# Altium PCB VCA.PcbDoc
Units mm, origin at the board's own origin, x right, y up, seen from the top; angles counter-clockwise.
Board outline 119.35 x 110.6 mm, 2 copper layers (Top Layer, Bottom Layer); 107 components, 65 nets, 292 pads, 0 vias.
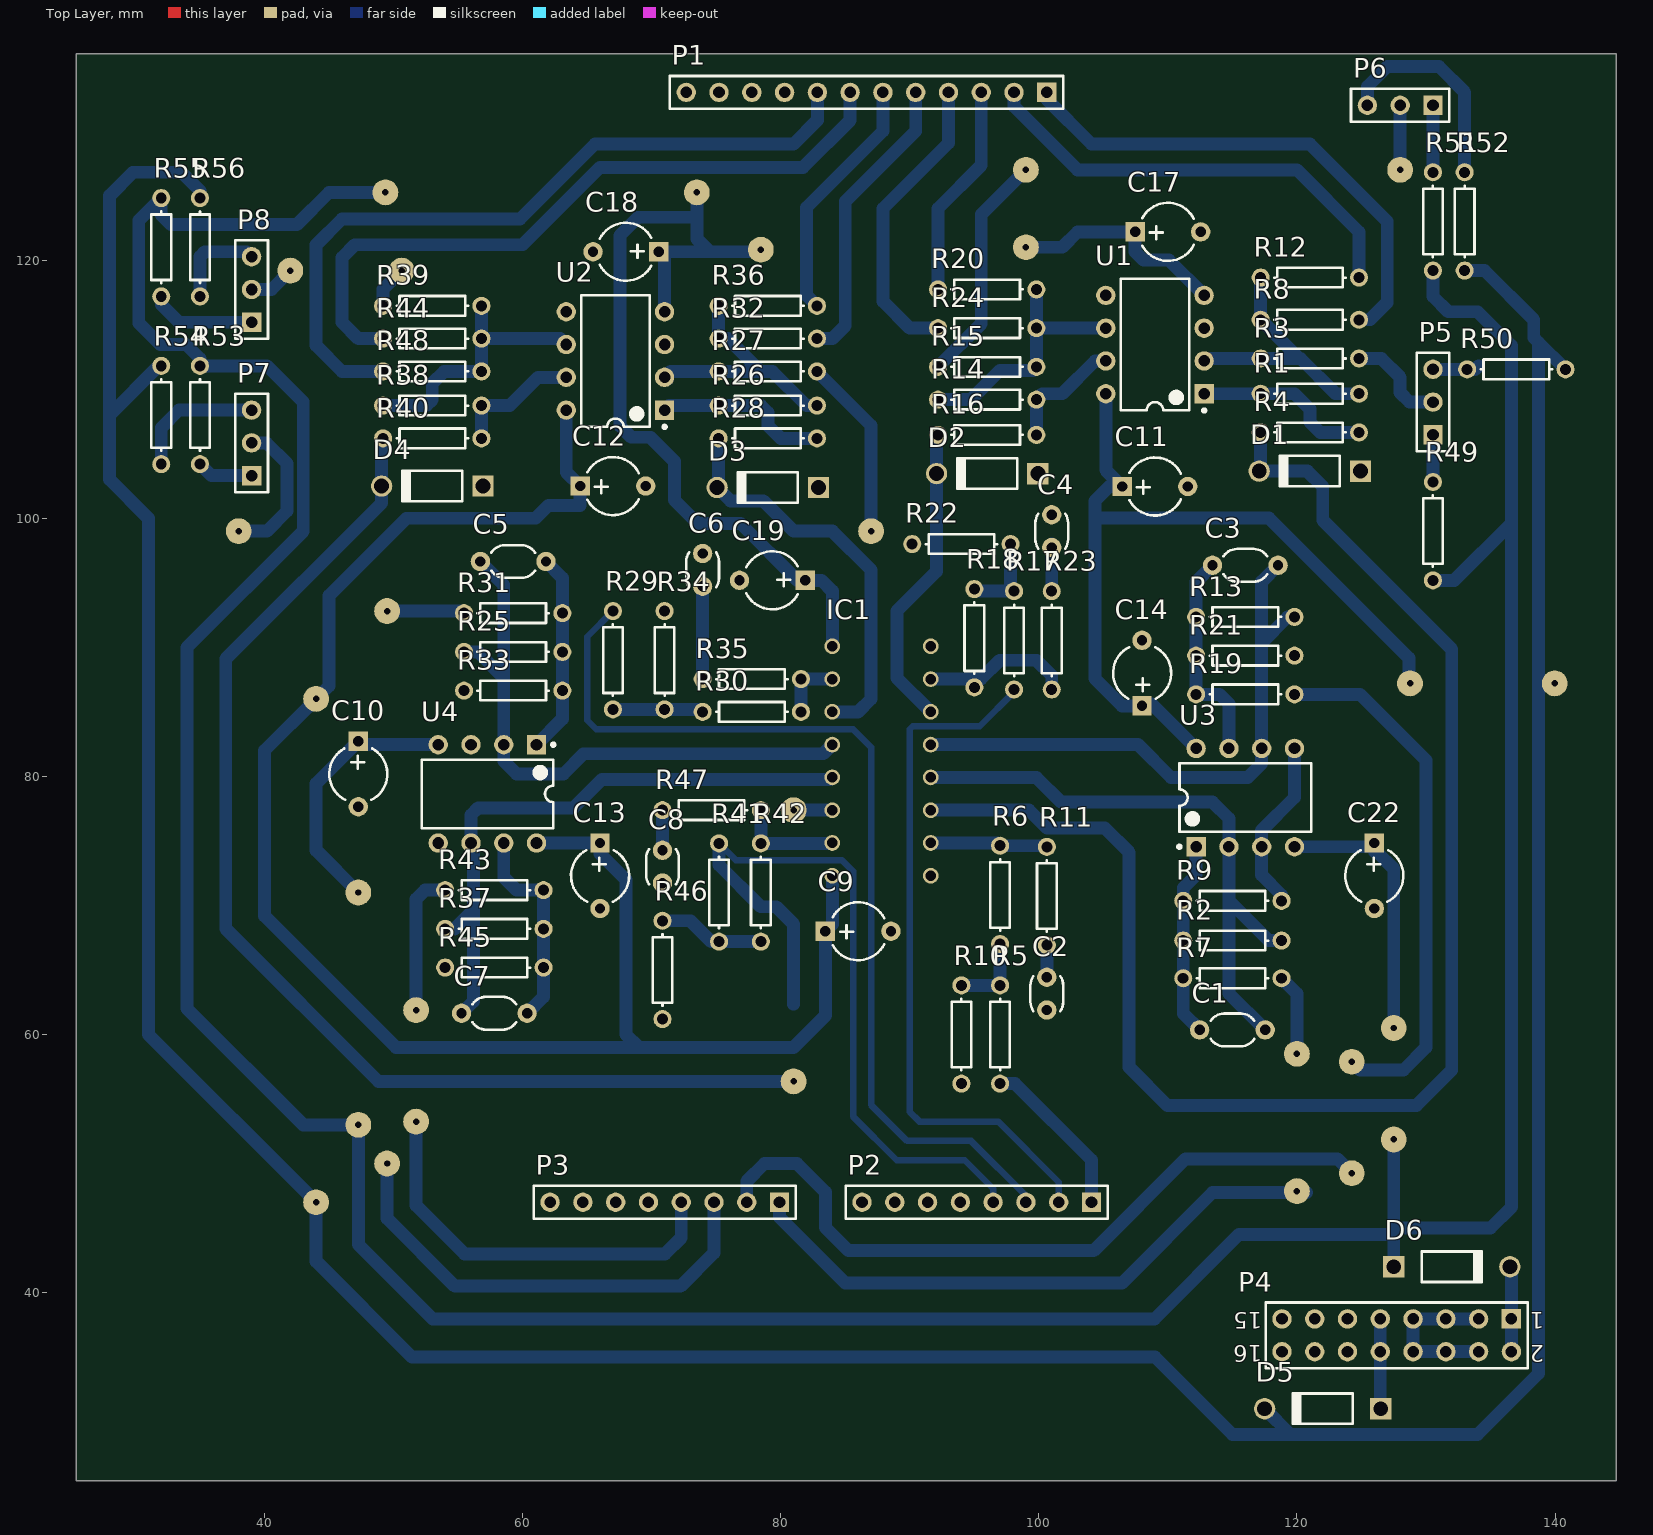
[diagram p0: Top Layer view]
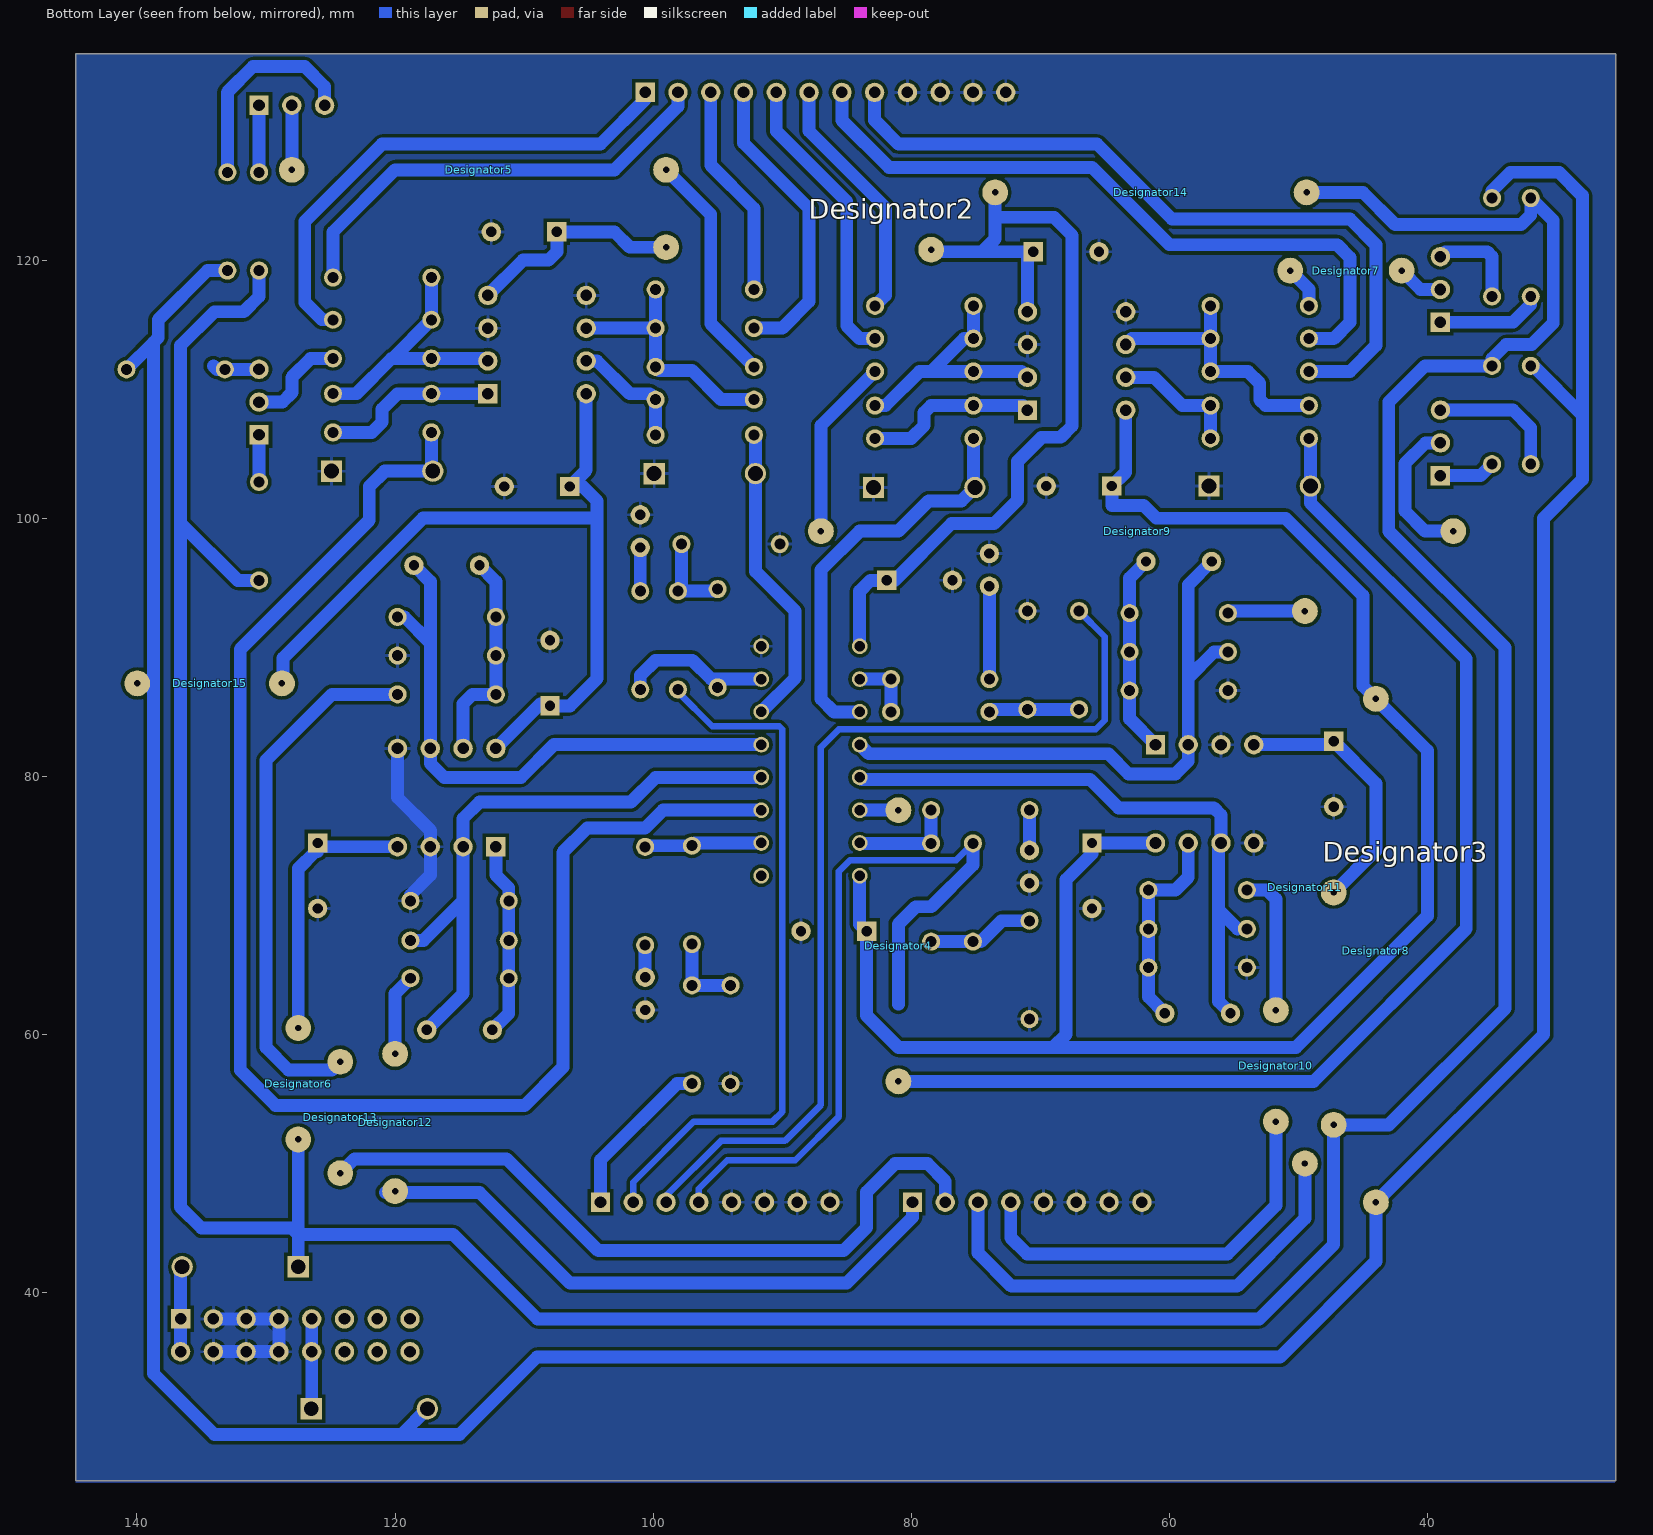
[diagram p1: Bottom Layer view, seen from below]

## Layer stack, top to bottom
Top Solder: solder mask 0.0102, Solder Resist, Dk 3.5
Top Layer: signal copper 0.0356
Dielectric 1: dielectric 0.32, FR-4, Dk 4.8
Bottom Layer: signal copper 0.0356
Bottom Solder: solder mask 0.0102, Solder Resist, Dk 3.5

## Board outline
25.4,25.4 144.75,25.4 144.75,136 25.4,136

## Design rules (kind name [scope] priority, off if disabled: settings)
Clearance [All] p1: gap=0.254 ignorepadtopadclearanceinfootprint=FALSE except(0: Arc-Hole Track-Hole SMDPad-Hole THPad-Hole Via-Hole Fill-Hole Poly-Hole Region-Hole Text-Hole)
ComponentClearance [All] p1: gap=0 collisioncheckmode=3 verticalgap=0.254 showdistances=FALSE
PolygonConnect [All] p1: connectstyle=Relief reliefconductorwidth=0.254 reliefentries=4 polygonreliefangle="90 Angle" airgapwidth=0.254
RoutingVias [All] p1: holewidth=0.711 width=1.27 viastyle="Through Hole" minholewidth=0.711 minwidth=1.27 maxholewidth=0.711 maxwidth=1.27
SolderMaskExpansion [All] p1: expansion=0.102
Width [All] p1: maxlimit=2 minlimit=0.254 preferedwidth=1
29 further rules are at their usual default settings.

## Classes and differential pairs
component class VCA: C1 C2 C3 C4 C5 C6 C7 C8 C9 C10 C11 C12 C13 C14 C17 C18 C19 C22 D1 D2 D3 D4 D5 D6 IC1 P1 P2 P3 P4 P5 P6 P7 P8 R1 R2 R3 R4 R5 R6 R7 R8 R9 R10 R11 R12 R13 R14 R15 R16 R17 R18 R19 R20 R21 R22 R23 R24 R25 R26 R27 R28 R29 R30 R31 R32 R33 R34 R35 R36 R37 R38 R39 R40 R41 R42 R43 R44 R45 R46 R47 R48 R49 R50 R51 R52 R53 R54 R55 R56 U1 U2 U3 U4

## Components (designator, comment, footprint, x,y, rotation, side; value= is the part's Value field where it differs from the comment)
C1 "100pF" CAPRR508-254X381X584 115,60.355 r180 top
C2 "560pF" CAPRR254-254X381X381 100.62,63.165 r90 top
C3 "100pF" CAPRR508-254X381X584 116,96.355 r180 top
C4 "560pF" CAPRR254-254X381X381 101,99 r270 top
C5 "100pF" CAPRR508-254X381X584 59.27,96.644 r0 top
C6 "560pF" CAPRR254-254X381X381 73.95,96 r270 top
C7 "100pF" CAPRR508-254X381X584 57.81,61.644 r0 top
C8 "560pF" CAPRR254-254X381X381 70.84,73 r90 top
C9 "0.1uF" CAPPRB508-450x850 86,68 r0 top
C10 "0.1uF" CAPPRB508-450x850 47.27,80.184 r270 top
C11 "0.1uF" CAPPRB508-450x850 109,102.46 r0 top
C12 "0.1uF" CAPPRB508-450x850 67,102.495 r0 top
C13 "0.1uF" CAPPRB508-450x850 66,72.3 r270 top
C14 "0.1uF" CAPPRB508-450x850 108,88 r90 top
C17 "0.1uF" CAPPRB508-450x850 110,122.19 r0 top
C18 "0.1uF" CAPPRB508-450x850 68,120.65 r180 top
C19 "0.1uF" CAPPRB508-450x850 79.35,95.19 r180 top
C22 "0.1uF" CAPPRB508-450x850 126,72.3 r270 top
D1 "1N5817-T" DIOD-DO-41-P-2 121,103.65 r180 top
D2 "1N5817-T" DIOD-DO-41-P-2 96,103.46 r180 top
D3 "1N5817-T" DIOD-DO-41-P-2 79,102.38 r180 top
D4 "1N5817-T" DIOD-DO-41-P-2 53,102.495 r180 top
D5 "1N4001-T" DIOD-DO-41-P-2_V 122,31 r180 top
D6 "1N4001-T" DIOD-DO-41-P-2_V 132,42 r0 top
Designator2 "Comment" Jumper#1 87.096,120.81 r180 bottom
Designator3 "Comment" Jumper#2 51.389,71.014 r90 bottom
Designator4 "Comment" Jumper#3 81,56.364 r90 bottom
Designator5 "Comment" Jumper#4 99,127 r0 bottom
Designator6 "Comment" Jumper#5 127.504,60.5 r270 bottom
Designator7 "Comment" Jumper#5 50.636,119.19 r180 bottom
Designator8 "Comment" Jumper#6 44,86 r270 bottom
Designator9 "Comment" Jumper#7 46.636,99 r180 bottom
Designator10 "Comment" Jumper#5 51.75,53.25 r90 bottom
Designator11 "Comment" Jumper#8 49.5,50 r90 bottom
Designator12 "Comment" Jumper#9 120,47.864 r90 bottom
Designator13 "Comment" Jumper#5 124.25,49.25 r90 bottom
Designator14 "Comment" Jumper#10 49.364,125.25 r0 bottom
Designator15 "Comment" Jumper#11 128.764,87.2 r0 bottom
IC1 "SSM2164P" DIL16 87.81,81.19 r90 top
P1 "Header 12" HDR1X12 100.62,133 r180 top
P2 "Header 8" HDR1X8 104.08,47 r180 top
P3 "Header 8" HDR1X8 79.91,47 r180 top
P4 "Header 8X2" HDR2X8 136.62,37.96 r180 top
P5 "Header 3" HDR1X3 130.54,106.46 r90 top
P6 "Header 3" HDR1X3 130.54,132 r180 top
P7 "Header 3" HDR1X3 39,103.3 r90 top
P8 "Header 3" HDR1X3 39,115.19 r90 top
R1 "Res1" AXIAL-0.3 121,109.65 r180 top value=1K
R2 "Res1" AXIAL-0.3 115,67.275 r0 top value=1K
R3 "Res1" AXIAL-0.3 121,112.38 r180 top value=1K
R4 "Res1" AXIAL-0.3 121,106.65 r180 top value=1K
R5 "Res1" AXIAL-0.3 97,60 r90 top value=1K
R6 "Res1" AXIAL-0.3 97,70.815 r90 top value=1K
R7 "Res1" AXIAL-0.3 115,64.355 r180 top value=1K
R8 "Res1" AXIAL-0.3 121,115.38 r180 top value=1K
R9 "Res1" AXIAL-0.3 115,70.355 r180 top value=1K
R10 "Res1" AXIAL-0.3 94,60 r90 top value=1K
R11 "Res1" AXIAL-0.3 100.62,70.73 r90 top value=1K
R12 "Res1" AXIAL-0.3 121,118.65 r180 top value=1K
R13 "Res1" AXIAL-0.3 116,92.355 r0 top value=1K
R14 "Res1" AXIAL-0.3 96,109.19 r0 top value=1K
R15 "Res1" AXIAL-0.3 96,111.73 r0 top value=1K
R16 "Res1" AXIAL-0.3 96,106.46 r180 top value=1K
R17 "Res1" AXIAL-0.3 98.08,90.54 r90 top value=1K
R18 "Res1" AXIAL-0.3 95,90.705 r270 top value=1K
R19 "Res1" AXIAL-0.3 116,86.355 r180 top value=1K
R20 "Res1" AXIAL-0.3 96,117.73 r0 top value=1K
R21 "Res1" AXIAL-0.3 116,89.355 r180 top value=1K
R22 "Res1" AXIAL-0.3 94,98 r0 top value=1K
R23 "Res1" AXIAL-0.3 101,90.54 r270 top value=1K
R24 "Res1" AXIAL-0.3 96,114.73 r0 top value=1K
R25 "Res1" AXIAL-0.3 59.27,89.644 r180 top value=1K
R26 "Res1" AXIAL-0.3 79,108.73 r180 top value=1K
R27 "Res1" AXIAL-0.3 79,111.38 r180 top value=1K
R28 "Res1" AXIAL-0.3 79,106.19 r180 top value=1K
R29 "Res1" AXIAL-0.3 67,89 r270 top value=1K
R30 "Res1" AXIAL-0.3 77.76,85 r0 top value=1K
R31 "Res1" AXIAL-0.3 59.27,92.644 r0 top value=1K
R32 "Res1" AXIAL-0.3 79,113.92 r180 top value=1K
R33 "Res1" AXIAL-0.3 59.27,86.644 r0 top value=1K
R34 "Res1" AXIAL-0.3 71,89 r270 top value=1K
R35 "Res1" AXIAL-0.3 77.76,87.54 r0 top value=1K
R36 "Res1" AXIAL-0.3 79,116.46 r180 top value=1K
R37 "Res1" AXIAL-0.3 57.81,68.184 r180 top value=1K
R38 "Res1" AXIAL-0.3 53,108.73 r0 top value=1K
R39 "Res1" AXIAL-0.3 53,116.46 r0 top value=1K
R40 "Res1" AXIAL-0.3 53,106.19 r180 top value=1K
R41 "Res1" AXIAL-0.3 75.22,71 r270 top value=1K
R42 "Res1" AXIAL-0.3 78.46,71 r90 top value=1K
R43 "Res1" AXIAL-0.3 57.81,71.184 r0 top value=1K
R44 "Res1" AXIAL-0.3 53,113.92 r0 top value=1K
R45 "Res1" AXIAL-0.3 57.81,65.184 r0 top value=1K
R46 "Res1" AXIAL-0.3 70.84,65 r90 top value=1K
R47 "Res1" AXIAL-0.3 74.65,77.38 r0 top value=1K
R48 "Res1" AXIAL-0.3 53,111.38 r0 top value=1K
R49 "Res1" AXIAL-0.3 130.54,99 r90 top value=1K
R50 "Res1" AXIAL-0.3 137,111.54 r0 top value=1K
R51 "Res1" AXIAL-0.3 130.54,123 r90 top value=1K
R52 "Res1" AXIAL-0.3 133,123 r270 top value=1K
R53 "Res1" AXIAL-0.3 35,108 r270 top value=1K
R54 "Res1" AXIAL-0.3 32,108 r90 top value=1K
R55 "Res1" AXIAL-0.3 32,121 r270 top value=1K
R56 "Res1" AXIAL-0.3 35,121 r90 top value=1K
U1 "TL082CN" STM-N8 109,113.46 r180 top
U2 "TL082CN" STM-N8 67.19,112.19 r180 top
U3 "TL082CN" STM-N8 116,78.355 r90 top
U4 "TL082CN" STM-N8 57.27,78.644 r270 top

## Footprints (in the part's own frame and the unit in brackets; to place one, negate y for a bottom-side part, rotate by r counter-clockwise, add the part's x,y. Pads: shape width x height; smd on the part's side, far side on the other; paste and mask are expansions set on the pad)
AXIAL-0.3 [mm] "Axial Device, Thru-Hole; 2 Leads; 0.3 in Pin Spacing"
  round 1.4 hole 0.85: 1(-3.81,0) 2(3.81,0)
  silkscreen extent -2.77,-0.76 2.77,0.76
CAPPRB508-450x850 [mm] "Capacitor, Polarized Radial Bead, Pin spacing 5.08mm - Body Diameter 4.5mm X Body Height 8.5mm"
  rect 1.5x1.5 hole 0.8: 1(-2.54,0)
  round 1.5 hole 0.8: 2(2.54,0)
  silkscreen extent -1.98,-2.25 2.01,2.25, body extent -2.79,-2.25 2.79,2.25, height 8.97
CAPRR254-254X381X381 [mm] "Capacitor Radial Rounded, Pin spacing 2.54mm - Body With 2.54mm X Body Length 3.81mm X Body Height 3.81mm"
  round 1.5 hole 0.8: 1(-1.27,0) 2(1.27,0)
  silkscreen extent -1.35,-1.27 1.35,1.27, body extent -1.9,-1.27 1.91,1.27, height 3.81
CAPRR508-254X381X584 [mm] "Capacitor Radial Rounded (KEMET C317), Pin spacing 5.08mm - Body With 2.54mm X Body Length 3.81mm X Body Height 5.84mm"
  round 1.5 hole 0.8: 1(-2.54,0) 2(2.54,0)
  silkscreen extent -1.69,-1.27 1.69,1.27, body extent -2.79,-1.27 2.79,1.27, height 5.84
DIL16 [mil]
  round 48 / inner round 60 / far side round 48 hole 32: 1(-350,-150) 2(-250,-150) 3(-150,-150) 4(-50,-150) 5(50,-150) 6(150,-150) 7(250,-150) 8(350,-150) 9(350,150) 10(250,150) 11(150,150) 12(50,150) 13(-50,150) 14(-150,150) 15(-250,150) 16(-350,150)
DIOD-DO-41-P-2 [mm] "THD, 2-Leads, Body 4.635x2.36mm, Pin Spacing 7.85mm"
  rect 1.65x1.65 hole 1.15: 1(-3.925,0)
  round 1.65 hole 1.15: 2(3.925,0)
  silkscreen extent -2.32,-1.18 2.32,1.18, body extent -4.36,-1.18 4.36,1.18, height 2.35
DIOD-DO-41-P-2_V [mm] "2-Leads, Axial Lead, Body 4.635x2.36mm, Pin Spacing 9mm"
  rect 1.65x1.65 hole 1.15: 1(-4.5,0)
  round 1.65 hole 1.15: 2(4.5,0)
  silkscreen extent -2.32,-1.18 2.32,1.18, body extent -4.93,-1.18 4.93,1.18, height 2.35
HDR1X3 [mm] "Connector; Header; 3 Position"
  rect 1.5x1.5 hole 0.9: 1(0,0)
  round 1.5 hole 0.9: 2(2.54,0) 3(5.08,0)
  silkscreen extent -1.27,-1.27 6.35,1.27
HDR1X8 [mm] "Connector; Header; 8 Position"
  rect 1.5x1.5 hole 0.9: 1(0,0)
  round 1.5 hole 0.9: 2(2.54,0) 3(5.08,0) 4(7.62,0) 5(10.16,0) 6(12.7,0) 7(15.24,0) 8(17.78,0)
  silkscreen extent -1.27,-1.27 19.05,1.27
HDR1X12 [mm] "Connector; Header; 12 Position"
  rect 1.5x1.5 hole 0.9: 1(0,0)
  round 1.5 hole 0.9: 2(2.54,0) 3(5.08,0) 4(7.62,0) 5(10.16,0) 6(12.7,0) 7(15.24,0) 8(17.78,0) 9(20.32,0) 10(22.86,0) 11(25.4,0) 12(27.94,0)
  silkscreen extent -1.27,-1.27 29.21,1.27
HDR2X8 [mm] "Connector; Header; 8x2 Position"
  rect 1.5x1.5 hole 0.9: 1(0,0)
  round 1.5 hole 0.9: 2(0,2.54) 3(2.54,0) 4(2.54,2.54) 5(5.08,0) 6(5.08,2.54) 7(7.62,0) 8(7.62,2.54) 9(10.16,0) 10(10.16,2.54) 11(12.7,0) 12(12.7,2.54) 13(15.24,0) 14(15.24,2.54) 15(17.78,0) 16(17.78,2.54)
  silkscreen extent -1.27,-1.27 19.05,3.81
Jumper#1 [mm]
  round 2 hole 0.5: 1(-11.904,0.19) 1(8.636,0)
Jumper#2 [mm]
  round 2 hole 0.5: 1(-18.014,-4.119) 1(-0.014,-4.119)
Jumper#3 [mm]
  round 2 hole 0.5: 1(0,0) 1(21.016,0)
Jumper#4 [mm]
  round 2 hole 0.5: 1(0,0) 1(29,0)
Jumper#5 [mm]
  round 2 hole 0.5: 1(0,0) 1(8.636,0)
Jumper#6 [mm]
  round 2 hole 0.5: 1(0,0) 1(39,0)
Jumper#7 [mm]
  round 2 hole 0.5: 1(-40.364,0) 1(8.636,0)
Jumper#8 [mm]
  round 2 hole 0.5: 1(0,0) 1(42.81,0)
Jumper#9 [mm]
  round 2 hole 0.5: 1(0,0) 1(10.636,0)
Jumper#10 [mm]
  round 2 hole 0.5: 1(0,0) 1(24.136,0)
Jumper#11 [mm]
  round 2 hole 0.5: 1(0,0) 1(11.211,0)
STM-N8 [mm] "DIP, 8-Leads, Body 10.15x7.1mm, Pitch 2.54mm"
  rect 1.5x1.5 hole 0.9: 1(-3.81,3.81)
  round 1.5 hole 0.9: 2(-3.81,1.27) 3(-3.81,-1.27) 4(-3.81,-3.81) 5(3.81,-3.81) 6(3.81,-1.27) 7(3.81,1.27) 8(3.81,3.81)
  silkscreen extent -3.94,-5.1 2.65,5.23, body extent -3.95,-5.07 3.95,5.07, height 5.33

## Part data
C1 C3 C5 C7: library part CCR_100PF_100V_5%_C0G_508-254X381X584, "Non-polarised capacitor", Case="LS5.08 W2.54 x L3.81 x H5.84", Manufacturer=GENERIC, Manufacturer1 ComponentHeight=5.84mm, Manufacturer1 Example=KEMET, Manufacturer1 Part Number=C317C101J1G5TA, Tolerance=±5%, Voltage=100VDC, Author="CERN DEM JLC", ComponentHeight=5.84mm, Component Type=Standard, CreateDate=17/12/2008, HelpURL=\\cern.ch\dfs\Applications\Altium\Datasheets\CCR_KEMET_C317.pdf, LatestRevisionDate=16/04/2015, Manufacturer Part Number=CCR_100PF_100V_5%_C0G_508-254X381X584, Mounted=Yes, Part Description="Radial Lead Type Multilayer Ceramic Capacitor", Part Number=CCR_100PF_100V_5%_C0G_508-254X381X584, Pin Count=2, Sense=No, SMD=No, Socket=No, Status=None, TC=C0G
C2 C4 C6 C8: library part CCR_560PF_100V_5%_C0G_254-254X381X381, "Non-polarised capacitor", Case="LS2.54 W2.54 x L3.81 x H3.81", Manufacturer=AVX, Manufacturer Part Number=SR151A561JAA, Tolerance=±5%, Voltage=100VDC, Author="CERN DEM JLC", ComponentHeight=3.81mm, Component Type=Standard, CreateDate=17/11/2010, HelpURL=\\cern.ch\dfs\Applications\Altium\Datasheets\CCR_AVX_SR15.pdf, LatestRevisionDate=16/04/2015, Mounted=Yes, Part Description="Radial Lead Type Multilayer Ceramic Capacitor", Part Number=CCR_560PF_100V_5%_C0G_254-254X381X381, Pin Count=2, Sense=No, SMD=No, Socket=No, Status=None, TC=C0G
C9 C10 C11 C12 C13 C14 C17 C18 C19 C22: library part CTEB_0.1UF_35V_10%_508-450X850, "Polarised capacitor", Case="LS5.08 D4.5 x H8.5", Manufacturer=AVX, Manufacturer Part Number=TAP104M035CCS-LF, Tolerance=±10%, Voltage=35V, Author="CERN DEM JLC", ComponentHeight=8.5mm, Component Type=Standard, CreateDate=19/08/2010, HelpURL=\\cern.ch\dfs\Applications\Altium\Datasheets\CTEB_AVX_TAP.pdf, LatestRevisionDate=19/08/2010, Mounted=Yes, Part Description="Solid Tantalum Resin Dipped Capacitor", Part Number=CTEB_0.1UF_35V_10%_508-450X850, Pin Count=2, Sense=No, SMD=No, Socket=No, Status=None
D1 D2 D3 D4: library part CMP-2000-05521-1, "Schottky Barrier Rectifier, 1 A, 20 V, -65 to 125 degC, 2-Pin DO-41, RoHS, Tape and Reel", If - Forward Current=1A, Ifsm - Forward Surge Current=25A, Ir - Reverse Current=1000uA, Manufacturer=DiodesIncorporated, Maximum Operating Temperature=+125C, Minimum Operating Temperature=-65C, Operating Temperature Range=-65Cto+125C, Package / Case=DO-41, Package Description="2-Pin Through Hole Device, Body 4.635 x 2.36 mm, Pin Spacing 7.85 mm", Package Reference=DO-41-P-2, Vf - Forward Voltage=0.75Vat3A, Vrrm - Repetitive Reverse Voltage=20V, Brand=DiodesIncorporated, Configuration=Single, Datasheet URL=http://www.diodes.com/_files/datasheets/ds23001.pdf, Datasheet Version="Rev. 8-2, 05/2009", Factory Pack Quantity=5000, Height=2.72mm, Length=5.21mm, Manufacturer URL=http://www.diodes.com/, Mounting Style=ThroughHole, Mounting Technology=ThroughHole, Packaging=Reel, Product=SchottkyRectifiers, Product Category=SchottkyDiodes&Rectifiers, RoHS=True, Series=1N58, Technology=Si, Termination Style=ThroughHole, Type=SchottkyDiode, Unit Weight=0.010582oz, Width=2.72mm
D5 D6: library part CMP-0639-00006-1, "1.0 A Rectifier, 15 pF, 50 V, -65 to 150 degC, 2-Pin DO-41 Plastic, RoHS, Tape and Reel", Manufacturer="Diodes Inc", Max. Average Rectified Current IO (A)=1, Operating Temperature Range (degC)="-65 to 150", ComponentLink1Description="Manufacturer URL", ComponentLink1URL=http://diodes.com/, ComponentLink2Description=Datasheet, ComponentLink2URL=http://diodes.com/datasheets/ds28002.pdf, CT (pF)=15, DatasheetVersion="Rev. 8-2", Max. IFSM (A)=30, Max. IR (uA)=5, Mounting Technology="Through Hole", PackageDescription="2-Pin Axial Lead, Body 4.635 x 2.36 mm, Lead Spread 25.4 mm", PackageReference=DO-41-P-2, Packing="Tape and Reel", PartNumber=1N4001-T, RoHS=TRUE, VF (V)=1, VRRM (V)=50
IC1: PACKAGE=DIL16, DeviceName=P, DeviceSetName=SSM2164, GateName_1=A, GateName_2=B, GateName_3=C, GateName_4=D, GateName_5=E, LibraryName=ssm2164_2, SymbolName_1=GAINCELL, SymbolName_2=GAINCELL, SymbolName_3=GAINCELL, SymbolName_4=GAINCELL, SymbolName_5=VCCBLK
P1: "Header, 12-Pin", LatestRevisionDate=17-Jul-2002, LatestRevisionNote="Re-released for DXP Platform.", Publisher="Altium Limited"
P2 P3: "Header, 8-Pin", LatestRevisionDate=17-Jul-2002, LatestRevisionNote="Re-released for DXP Platform.", Publisher="Altium Limited"
P4: "Header, 8-Pin, Dual row", LatestRevisionDate=17-Jul-2002, LatestRevisionNote="Re-released for DXP Platform.", Publisher="Altium Limited"
P5 P6 P7 P8: "Header, 3-Pin", LatestRevisionDate=17-Jul-2002, LatestRevisionNote="Re-released for DXP Platform.", Publisher="Altium Limited"
R1 R2 R3 R4 R5 R6 R7 R8 R9 R10 R11 R12 R13 R14 R15 R16 R17 R18 R19 R20 R21 R22 R23 R24 R25 R26 R27 R28 R29 R30 R31 R32 R33 R34 R35 R36 R37 R38 R39 R40 R41 R42 R43 R44 R45 R46 R47 R48 R49 R50 R51 R52 R53 R54 R55 R56: "Resistor", LatestRevisionDate=17-Jul-2002, LatestRevisionNote="Re-released for DXP Platform.", PackageDescription="Axial Device, Thru-Hole; 2 Leads; 0.3 in Pin Spacing", PackageReference=AXIAL-0.3, Published=8-Jun-2000, Publisher="Altium Limited"
U1 U2 U3 U4: library part CMP-2000-07247-1, "General Purpose JFET Dual Operational Amplifier, 4 MHz, 6 to 36 V, 0 to 70 degC, 8-Pin DIP (N8), RoHS, Tube", Manufacturer=STMicroelectronics, Manufacturer Type=GeneralPurposeAmplifier, Maximum Dual Supply Voltage=18V, Maximum Input Bias Current=0.0004uA@15V, Maximum Input Offset Voltage=10mV@15V, Maximum Operating Temperature=70C, Maximum Power Dissipation=680mW, Maximum Supply Current=2.5mA@15V, Minimum Dual Supply Voltage=3V, Minimum Operating Temperature=0C, Package Description="8-Pin Double In-line Package, Body 9.59 x 6.605 mm, Pitch 2.54 mm", Package Reference=N8, Power Supply Type=Dual, Supplier_Package=PDIP, Typical Dual Supply Voltage=5V, Typical Input Noise Voltage Density=15nV/rtHz@15V, Typical Voltage Gain=106.02dB, Datasheet URL=https://datasheet.ciiva.com/19471/2002077-19471009.pdf, Datasheet Version="Rev. 10, 06/2008", Family=TL082, Manufacturer URL=http://www.st.com/, Minimum CMRR=70dB, Mounting=ThroughHole, Mounting Technology=ThroughHole, Number of Channels per Chip=2, Packaging=Tube, PartId=1, Pin_Count=8, Product Height=3.3mm, Product Length=9.27mm, Product Type=OPAmp, Product Width=6.35mm, Rail to Rail=No, Shut Down Support=No, Technology=BiFET, Type=GeneralPurposeAmplifier, Typical Gain Bandwidth Product=4MHz, Typical Slew Rate=16V/us@15V

## Nets (pads, with @x,y where several pads share a name; then routed paths per layer and width w, separated by ;. In a path a pad name is that pad's centre, name@x,y a point inside that pad or via, vN(x,y) a via of type N, cw(c..) or ccw(c..) an arc to the next point about the centre after c; other vN are vias at no path point)
+12V: C9.1 C11.1 C12.1 C13.1 C14.1 D5.2 Designator8.1 Designator15.1 IC1.16 R50.2 R52.2 R54.2 R56.2 U1.8 U2.8 U3.8 U4.8 | length 503.4
  Bottom Layer w1: R54.2 31.81,111.81 28,108 ; R56.2 35,125.38 33.57,126.81 29.81,126.81 28,125 28,108 ; U4.8 C13.1@66,74.834 ; U2.8 63.38,103.575 C12.1 64.46,101 62,101 61,100 51,100 45,94 45,87 44,86 40,82 40,69.19 50.19,59 69,59 ; C13.1 C13.1@66,74.834 ; IC1.16 84,68.54 C9.1 83.46,61.46 81,59 69,59 ; U1.8 105.19,103.73 C11.1 105.46,102.46 104.35,101.35 104.35,100.008 ; C14.1 106.46,85.46 104.35,87.57 104.35,100.008 ; C14.1@108.73,85.625 U3.8 ; D5.2 119.5,29 ; Designator15.1@128.675,87.325 128.675,89.175 117.842,100.008 104.35,100.008 ; R52.2 134.54,119.19 138.35,115.38 138.35,114 138.725,113.625 ; R50.2 138.725,113.625 ; 28,108 28,103 31,100 31,60 44,47 44,42.42 51.42,35 109,35 115,29 119.5,29 ; C13.1@66,74.834 66,74 68,72 68,60 69,59 ; 119.5,29 134,29 138.725,33.725 138.725,86.1 138.725,113.625
-12V: C10.1 C17.1 C18.1 C19.1 C22.1 D6.1 Designator2.1 Designator3.1 Designator6.1 Designator14.1 IC1.9 R49.1 R51.1 R53.1 R55.1 U1.4 U2.4 U3.4 U4.4 | length 438.2
  Bottom Layer w1: Designator3.1@47.27,71 44,74.27 44,79.454 C10.1 47.54,82.454 U4.4 ; Designator14.1@49.364,125.25 45,125.25 42.5,122.75 32.75,122.75 32,123.5 R55.1 30.254,123.064 30.254,115.126 31.92,113.46 33.92,113.46 35,112.38 R53.1 40.19,111.81 43,109 43,99 34,90 34,62 43,53 47.27,53 47.27,43.73 53.04,37.96 108.96,37.96 115.5,44.5 127.5,44.5 ; C18.1 C18.1@71,120.65 ; U2.4 C18.1@71,120.65 ; Designator14.1@73.5,125.25 73.5,123.325 ; Designator2.1@78.46,120.81 78.3,120.65 74.5,120.65 ; IC1.9 84,94.35 83.16,95.19 C19.1 81.285,95.19 76.875,99.6 73.575,99.6 71.761,101.414 71.761,104.414 69.9,106.275 68.425,106.275 67.55,107.15 67.55,121.925 68.95,123.325 73.5,123.325 ; Designator2.1@99,121 101.81,121 103,122.19 C17.1 107.46,120.65 108.11,120 110.08,120 U1.4 ; U3.4 C22.1@125.705,74.545 ; C22.1 126,74.184 126.171,74.184 127.504,72.851 Designator6.1@127.504,60.5 ; D6.1 127.5,44.5 ; Designator6.1@127.5,51.864 127.5,44.5 ; R49.1 132.19,95.19 136.62,99.62 ; R51.1 130.54,117.19 131.73,116 134,116 136.62,113.38 136.62,99.62 ; C18.1@71,120.65 74.5,120.65 ; 73.5,123.325 73.5,121.65 74.5,120.65 ; 127.5,44.5 128,45 135,45 136.62,46.62 136.62,99.62
GND: C2.1 C4.1 C6.1 C8.1 C9.2 C10.2 C11.2 C12.2 C13.2 C14.2 C17.2 C18.2 C19.2 C22.2 D1.1 D2.1 D3.1 D4.1 IC1.8 P1.9 P1.10 P1.11 P1.12 P2.5 P2.6 P2.7 P2.8 P3.5 P3.6 P3.7 P3.8 P4.3 P4.4 P4.5 P4.6 P4.7 P4.8 R9.1 R10.1 R21.1 R22.1 R33.1 R34.1 R45.1 R46.1 U1.3 U1.5 U2.3 U2.5 U3.3 U3.5 U4.3 U4.5 | length 26.4
  Bottom Layer w1: R9.1 118.81,70.815 117.27,72.355 U3.3 117.27,75.815 119.81,78.355 U3.5 U3.5@119.81,82.355 ; P4.4 P4.6 P4.8 P4.7 P4.5 P4.3
NetC1_1: C1.1 IC1.4 R2.2 U3.2 | length 47.3
  Bottom Layer w1: IC1.4 99.81,79.92 101.73,78 113.46,78 114.73,76.73 U3.2 114.73,70.355 ; C1.1 114.73,63.165 114.73,70.355 ; R2.2 117.81,67.275 114.73,70.355
NetC1_2: C1.2 R2.1 R7.2 R9.2 U3.1 | length 15.1
  Bottom Layer w1: U3.1 112.19,72.355 111.19,71.355 R9.2 R2.1 R7.2 111.19,61.625 C1.2
NetC2_2: C2.2 R11.1 | length 2.5
  Bottom Layer w1: C2.2 R11.1
NetC3_1: C3.1 IC1.5 R13.2 U3.6 | length 46.4
  Bottom Layer w1: IC1.5 107.7,82.46 110.24,79.92 116.19,79.92 117.27,81 U3.6 117.27,90.355 ; C3.1 117.27,95.085 117.27,90.355 ; R13.2 119.27,92.355 117.27,90.355
NetC3_2: C3.2 R13.1 R19.2 R21.2 U3.7 | length 16.8
  Bottom Layer w1: C3.2 112.19,95.085 R13.1 R21.2 R19.2 114,86.355 114.73,85.625 U3.7
NetC4_2: C4.2 R23.1 | length 3.7
  Bottom Layer w1: R23.1 C4.2@101,98
NetC5_1: C5.1 IC1.12 R25.2 U4.2 | length 46.9
  Bottom Layer w1: R25.2 56.54,89.644 58.54,87.644 ; C5.1 58.54,94.834 58.54,87.644 ; IC1.12 83.29,81.75 64.726,81.75 63.16,80.184 59.54,80.184 58.54,81.184 U4.2 58.54,87.644
NetC5_2: C5.2 R25.1 R31.2 R33.2 U4.1 | length 15.5
  Bottom Layer w1: U4.1 63.08,84.454 R33.2 R25.1 R31.2 63.08,95.374 C5.2
NetC6_2: C6.2 R35.1 | length 7.2
  Bottom Layer w1: R35.1 C6.2
NetC7_1: C7.1 IC1.13 R37.2 U4.6 | length 47.2
  Bottom Layer w1: 54.73,68.184 56.184,69.638 ; C7.1 56.184,62.558 56.184,69.638 ; IC1.13 83.83,79.75 66.136,79.75 63.95,77.564 56.564,77.564 56,77 U4.6 56.184,74.834 56.184,69.638
NetC7_2: C7.2 R37.1 R43.2 R45.2 U4.7 | length 16.2
  Bottom Layer w1: U4.7 58.54,72.184 59.54,71.184 R43.2 R37.1 R45.2 61.62,62.914 C7.2
NetC8_2: C8.2 R47.1 | length 3.1
  Bottom Layer w1: C8.2 R47.1
NetD1_2: D1.2 IC1.3 R4.2 | length 118.6
  Top Layer w1: D1.2 D1.2@117.19,103.765
  Bottom Layer w1: IC1.3 99.24,77.38 100.62,76 105.11,76 107,74.11 107,57.46 109.96,54.5 129.25,54.5 132,57.25 132,89.85 122,99.85 122,102.46 120.81,103.65 D1.2 ; D1.2@117.19,103.765 R4.2
NetD2_2: D2.2 IC1.6 R16.2 | length 23.9
  Bottom Layer w1: IC1.6 89,87.62 89,92.81 92.075,95.885 D2.2 92.075,106.345 R16.2
NetD3_2: D3.2 IC1.11 R28.2 | length 31.8
  Bottom Layer w1: R28.2 75.19,102.495 D3.2 76.105,101.35 78.65,101.35 81,99 84,99 87,96 87,86 86,85 IC1.11
NetD4_2: D4.2 Designator4.1 IC1.14 R40.2 | length 94.9
  Bottom Layer w1: R40.2 49.075,106.075 D4.2 49.075,101.179 37,89.104 37,68.19 48.826,56.364 Designator4.1@81,56.364 ; Designator4.1@81,77.38 IC1.14
NetD5_1: D5.1 P4.9 P4.10 | length 7
  Bottom Layer w1: P4.9 P4.10 126.46,31.04 D5.1
NetD6_2: D6.2 P4.1 P4.2 | length 6.6
  Bottom Layer w1: D6.2 136.62,41.88 P4.1 P4.2
NetIC1_2: IC1.2 R6.2 R11.2 | length 9.1
  Bottom Layer w1: IC1.2 96.785,74.84 R6.2 100.535,74.625 R11.2
NetIC1_7: IC1.7 R18.2 R23.2 | length 11.6
  Bottom Layer w1: IC1.7 95.51,87.54 96.97,89 99.81,89 101,87.81 R23.2
NetIC1_10: IC1.10 R30.2 R35.2 | length 5
  Bottom Layer w1: R30.2 R35.2 IC1.10
NetIC1_15: IC1.15 R42.2 R47.2 | length 8.1
  Bottom Layer w1: R47.2 R42.2 83.97,74.81 IC1.15
NetP1_1: P1.1 R8.1 | length 39.9
  Bottom Layer w1: P1.1 100.62,132.46 104.08,129 121,129 127,123 127,116.73 125.65,115.38 R8.1
NetP1_2: P1.2 R12.1 | length 35.4
  Bottom Layer w1: P1.2 98.08,131.92 103,127 120,127 124.81,122.19 R12.1
NetP1_3: P1.3 R20.1 | length 16.7
  Bottom Layer w1: R20.1 92.19,124 95.54,127.35 P1.3
NetP1_4: P1.4 R24.1 | length 23.4
  Bottom Layer w1: R24.1 90,114.73 87.92,116.81 87.92,124 93,129.08 P1.4
NetP1_5: P1.5 R32.1 | length 22.9
  Bottom Layer w1: R32.1 84,113.92 85,114.92 85,124.54 90.46,130 P1.5
NetP1_6: P1.6 R36.1 | length 19.3
  Bottom Layer w1: R36.1 82,117.27 82,124.08 87.92,130 P1.6
NetP1_7: P1.7 R44.1 | length 54.7
  Bottom Layer w1: R44.1 47.27,113.92 46,115.19 46,120.19 47,121.19 60,121.19 66,127.19 81.73,127.19 85.38,130.84 P1.7
NetP1_8: P1.8 R48.1 | length 58.8
  Bottom Layer w1: R48.1 46,111.38 44,113.38 44,121.19 46,123.19 59.792,123.19 65.602,129 81,129 82.84,130.84 P1.8
NetP2_1: P2.1 R5.1 | length 12.8
  Bottom Layer w1: R5.1 98.16,56.19 104.08,50.27 P2.1
NetP2_2: P2.2 R17.1 | length 54.5
  Bottom Layer w0.5: R17.1 98.08,86.54 95.426,83.886 90.242,83.886 90,83.644 90,54 90.75,53.25 96.85,53.25 101.54,48.56 P2.2
NetP2_3: P2.3 R29.1 | length 75.3
  Bottom Layer w0.5: R29.1 65,90.81 65,84.346 65.702,83.644 85.606,83.644 87,82.25 87,54.54 89.79,51.75 94.75,51.75 99,47.5 P2.3
NetP2_4: P2.4 R41.1 | length 60.1
  Bottom Layer w0.5: R41.1 76.53,73.5 84.75,73.5 85.606,72.644 85.606,53.644 89,50.25 94.25,50.25 96.46,48.04 P2.4
  Bottom Layer w1: R41.1 75.22,73.135 78.46,69.895 79.645,69.895 81,68.54 81,62.344
NetP3_1: Designator12.1 P3.1 R7.1 | length 53.4
  Bottom Layer w1: P3.1 79.91,45.84 85,40.75 106.46,40.75 113.46,47.75 Designator12.1@120.75,47.75 ; R7.1 120,63.165 Designator12.1@120,58.5
NetP3_2: Designator13.1 P3.2 R19.1 | length 98.2
  Bottom Layer w1: P3.2 77.37,48.62 78.75,50 81.25,50 83.46,47.79 83.46,45.04 85.25,43.25 104.25,43.25 111.364,50.364 123.136,50.364 Designator13.1@124.25,49.25 ; R19.1 124.895,86.355 130,81.25 130,59 128.25,57.25 124.886,57.25 Designator13.1@124.25,57.886
NetP3_3: Designator11.1 P3.3 R31.1 | length 42.3
  Bottom Layer w1: Designator11.1@49.5,49.5 49.5,45.75 54.75,40.5 72.25,40.5 74.83,43.08 P3.3 ; Designator11.1@49.5,92.81 55.294,92.81 R31.1
NetP3_4: Designator10.1 P3.4 R43.1 | length 43
  Bottom Layer w1: Designator10.1@51.75,53.25 51.75,46.75 55.5,43 71.04,43 72.29,44.25 P3.4 ; Designator10.1@51.75,61.886 51.75,70.5 52.434,71.184 R43.1
NetP5_1: P5.1 R49.2 | length 3.7
  Bottom Layer w1: R49.2 P5.1
NetP5_2: P5.2 R3.1 | length 7.8
  Bottom Layer w1: R3.1 126.54,112.38 128,110.92 128,109.73 128.73,109 P5.2
NetP5_3: P5.3 R50.1 | length 3.7
  Bottom Layer w1: P5.3 133.81,111.54 134.08,111.81
NetP6_1: P6.1 R51.2 | length 5.2
  Bottom Layer w1: R51.2 P6.1
NetP6_2: Designator5.1 P6.2 R15.1 | length 23.1
  Bottom Layer w1: R15.1 95.54,115.08 95.54,123.54 Designator5.1@99,127 ; Designator5.1@128,127 P6.2
NetP6_3: P6.3 R52.1 | length 16.7
  Bottom Layer w1: P6.3 125.46,133.46 127,135 131,135 133,133 R52.1
NetP7_1: P7.1 R53.2 | length 4.4
  Bottom Layer w1: R53.2 35.89,103.3 P7.1
NetP7_2: Designator9.1 P7.2 R27.1 | length 23.6
  Bottom Layer w1: 39,99 40.19,99 41.746,100.556 41.746,104.254 40.16,105.84 P7.2 ; R27.1 87,107.19 87,100
NetP7_3: P7.3 R54.1 | length 10.4
  Bottom Layer w1: R54.1 32,107 33.38,108.38 P7.3
NetP8_1: P8.1 R55.2 | length 8.2
  Bottom Layer w1: R55.2 32,116.57 33.38,115.19 P8.1
NetP8_2: Designator7.1 P8.2 R39.1 | length 6.9
  Bottom Layer w1: P8.2 40.54,117.73 Designator7.1@42,119.19 ; R39.1 49.19,117.744 Designator7.1@50.636,119.19
NetP8_3: P8.3 R56.1 | length 7.4
  Bottom Layer w1: R56.1 35,120.27 35.38,120.65 38.62,120.65 P8.3
NetR1_1: R1.1 R3.2 R8.2 R12.2 U1.2 | length 20.7
  Top Layer w1: U1.2 U1.2@113,112.38
  Bottom Layer w1: U1.2@113,112.38 R3.2 120.19,112.38 ; R12.2 R8.2 120.19,112.38 ; R1.1 123,109.65 120.27,112.38 120.19,112.38
NetR1_2: R1.2 R4.1 U1.1 | length 13.8
  Bottom Layer w1: U1.1 R1.2 119.81,109.65 121,108.46 121,107.46 121.81,106.65 R4.1
NetR5_2: R5.2 R6.1 R10.2 | length 6.2
  Bottom Layer w1: R10.2 R5.2 R6.1
NetR14_1: R14.1 R15.2 R20.2 R24.2 U1.6 | length 20.1
  Bottom Layer w1: R14.1 94.73,109.19 97,111.46 99.54,111.46 R15.2 R24.2 ; R20.2 R24.2 ; U1.6 R24.2
NetR14_2: R14.2 R16.1 U1.7 | length 9.4
  Bottom Layer w1: R16.1 R14.2 100.27,109.65 101.81,109.65 104.35,112.19 U1.7
NetR17_2: R17.2 R18.1 R22.2 | length 6.9
  Bottom Layer w1: R18.1 95.165,94.35 R17.2 97.81,94.62 R22.2
NetR26_1: R26.1 R27.2 R32.2 R36.2 U2.2 | length 20.2
  Bottom Layer w1: U2.2@71.19,110.73 U2.2 71.46,111.38 R27.2 78.46,111.38 ; R36.2 R32.2 75.92,113.92 78.46,111.38 ; R26.1 82,108.73 79.35,111.38 78.46,111.38
NetR26_2: R26.2 R28.1 U2.1 | length 13.6
  Bottom Layer w1: U2.1 71.35,108.73 R26.2 78.46,108.73 79,108.19 79,107.19 80,106.19 R28.1
NetR29_2: R29.2 R30.1 R34.2 | length 7
  Bottom Layer w1: R29.2 R34.2 73.76,85.19 R30.1
NetR38_1: R38.1 R39.2 R44.2 R48.2 U2.6 | length 21.3
  Bottom Layer w1: R38.1 52.54,108.73 53,109.19 53,110.46 53.92,111.38 R48.2 R44.2 ; R39.2 R44.2 ; U2.6 62.92,113.92 R44.2
NetR38_2: R38.2 R40.1 U2.7 | length 10
  Bottom Layer w1: R40.1 R38.2 59,108.73 61.19,110.92 U2.7
NetR41_2: R41.2 R42.1 R46.2 | length 8.3
  Bottom Layer w1: R46.2 73,68.81 74.62,67.19 R41.2 R42.1
pads on no net: IC1.1 P4.11 P4.12 P4.13 P4.14 P4.15 P4.16

## Polygon pours and split planes (outlines as drawn)
GND on Bottom Layer "GND" (solid, pour order 2): 147.75,92
GND on Bottom Layer "GND" (solid, pour order 0): 25.25,136 25.5,135.75 25.5,25.25 144.75,25.25 144.75,136

## Text inside footprints (layer, text, board x,y; h text height)
P4: Top Overlay "2" at 139.16,35.928 h1.27 r180; Top Overlay "1" at 139.16,38.468 h1.27 r180; Top Overlay "15" at 117.316,38.468 h1.27 r180; Top Overlay "16" at 117.316,35.928 h1.27 r180